# Altium PCB sdram_uni.PcbDoc
Units mm, origin at the board's own origin, x right, y up, seen from the top; angles counter-clockwise.
Board outline 29.21 x 50.8 mm, 2 copper layers (Top Layer, Bottom Layer), stack 1.671 mm thick; 10 components, 41 nets, 138 pads, 16 vias.
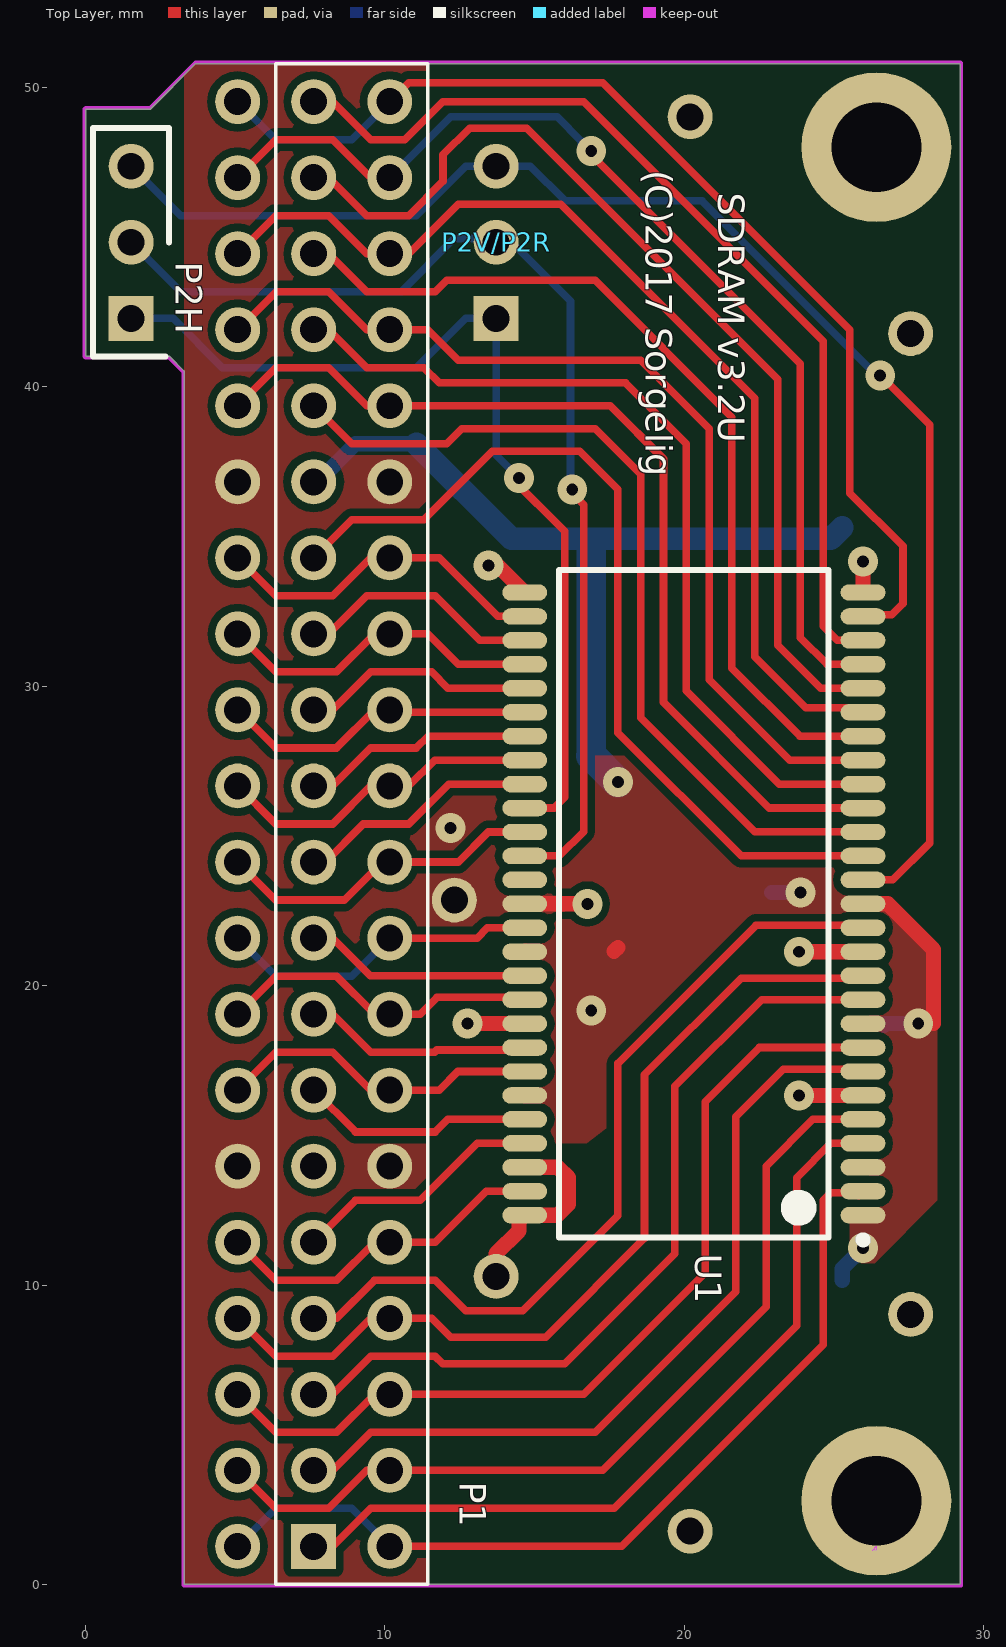
[diagram p0: Top Layer view]
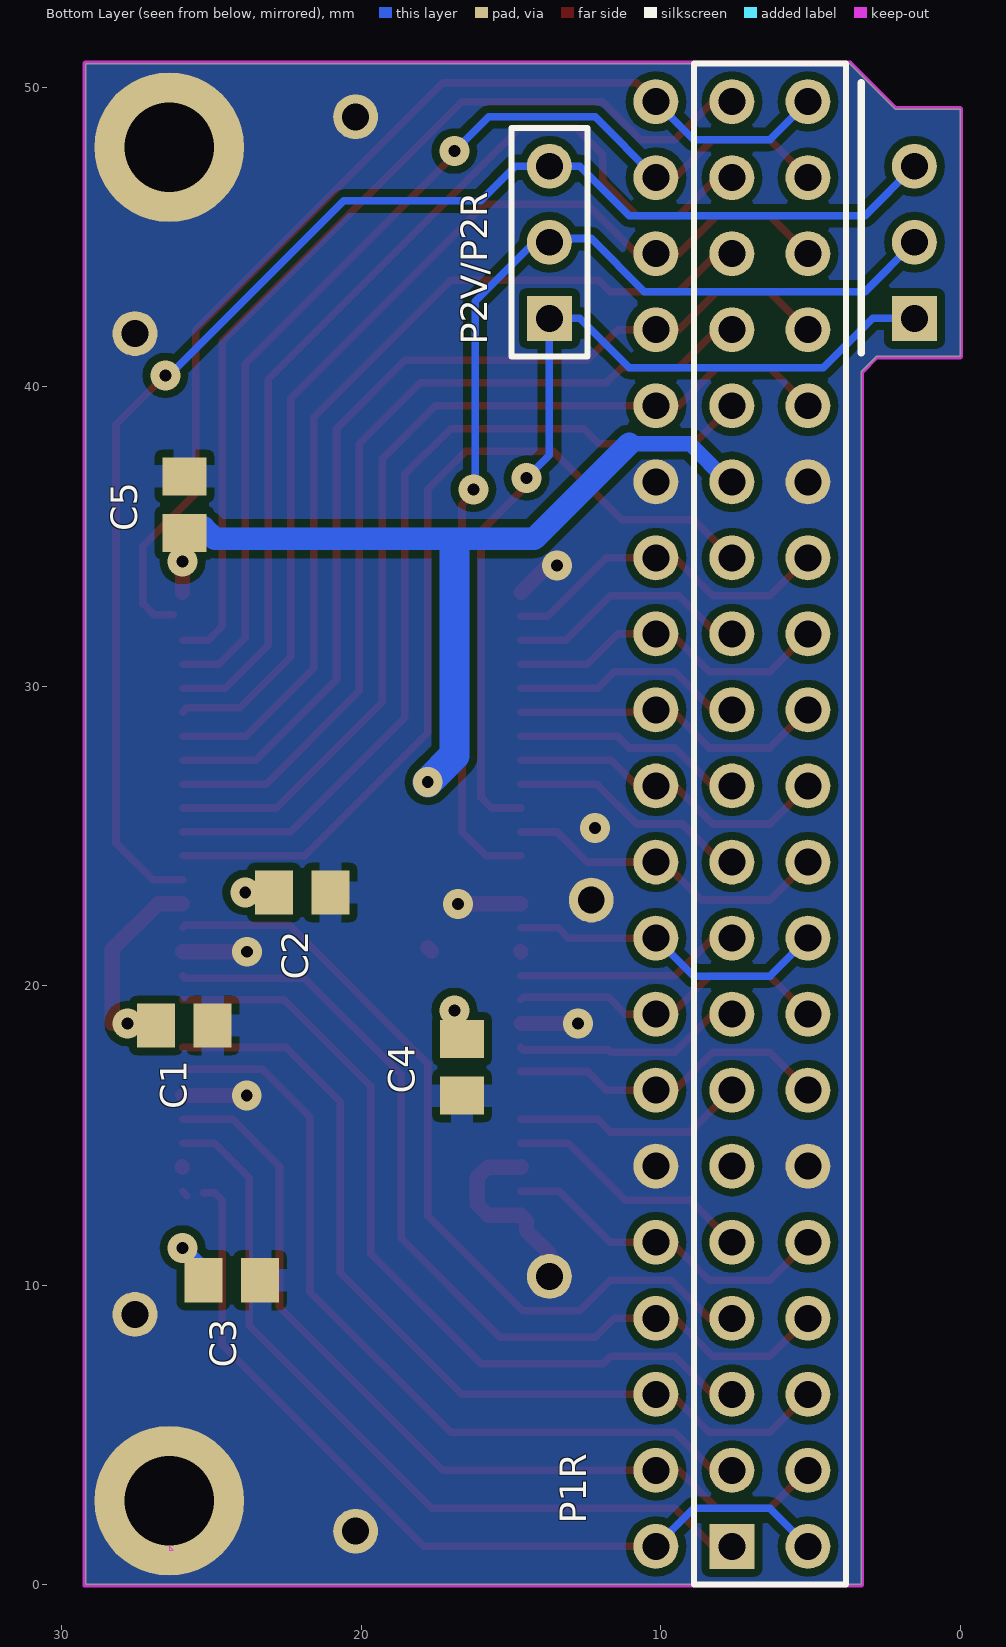
[diagram p1: Bottom Layer view, seen from below]
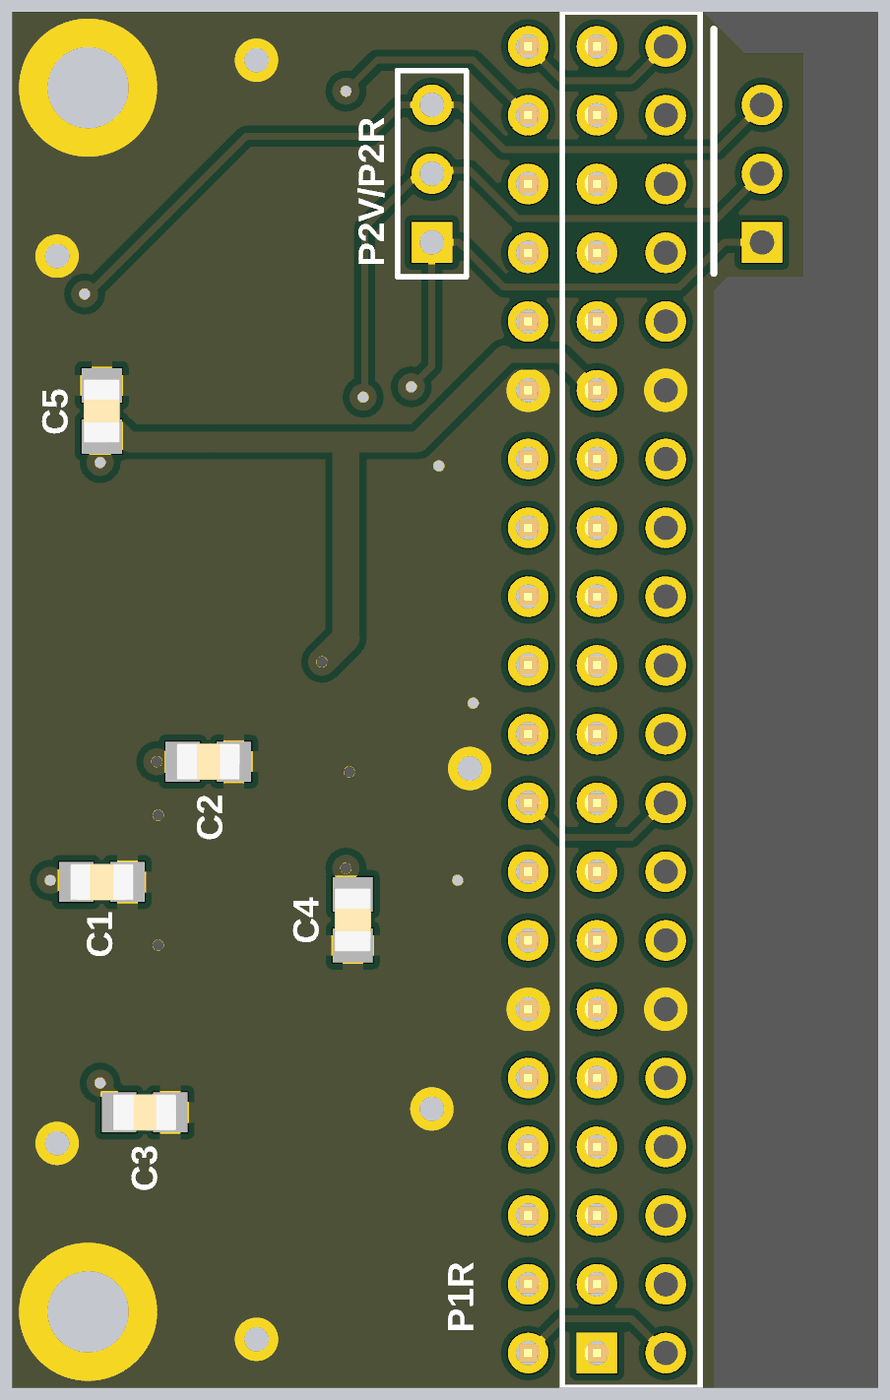
[diagram p2: 3D render of the assembled board from below, using the file's embedded part models]

## Layer stack, top to bottom
Top Solder: solder mask 0.0102, Solder Resist, Dk 3.5
Top Layer: signal copper 0.0356
Dielectric 1: dielectric 1.6, FR-4, Dk 4.8
Bottom Layer: signal copper 0.0356
Bottom Solder: solder mask 0.0102, Solder Resist, Dk 3.5

## Board outline
3.302,40.513 2.794,41.021 0,41.021 0,49.276 2.159,49.276 3.683,50.8 29.21,50.8 29.21,0 3.302,0

## Design rules (kind name [scope] priority, off if disabled: settings)
BoardOutlineClearance [All] p1: gap=0 ignorepadtopadclearanceinfootprint=FALSE
Clearance keep-out_clearance [InNamedPolygon('ground') vs OnLayer('Keep-Out Layer')] p1: gap=0 ignorepadtopadclearanceinfootprint=FALSE
Clearance [All] p2: gap=0.254 ignorepadtopadclearanceinfootprint=TRUE except(0: Arc-Hole Track-Hole SMDPad-Hole THPad-Hole Via-Hole Fill-Hole Poly-Hole Region-Hole Text-Hole)
ComponentClearance [All] p1 off: gap=0.254 collisioncheckmode=3 verticalgap=0.254 showdistances=FALSE
Height [All] p1 off: minheight=0 maxheight=25.4 prefheight=12.7
HoleSize [All] p1: absolutevalues=TRUE maxlimit=6 minlimit=0.025 maxpercent=80.000 minpercent=20.000
MinimumSolderMaskSliver [All] p1: minsoldermaskwidth=0.25
PolygonConnect PolygonConnect_1 [HasFootprint('C0805')] p1: connectstyle=Relief reliefconductorwidth=0.762 reliefentries=4 polygonreliefangle="90 Angle" airgapwidth=0.254
PolygonConnect [All] p2: connectstyle=Direct reliefconductorwidth=0.254 reliefentries=4 polygonreliefangle="90 Angle" airgapwidth=0.254
RoutingVias [All] p1: holewidth=0.4 width=1 viastyle="Through Hole" minholewidth=0.4 minwidth=1 maxholewidth=0.4 maxwidth=1
SilkToSolderMaskClearance [IsPad] p1 off: minsilkscreentomaskgap=0.127 clearancetoexposedcopper=TRUE
SolderMaskExpansion SolderMaskExpansion_U1 [InComponent('U1')] p1: expansion=0
SolderMaskExpansion [All] p2: expansion=0.051
Width Width_power [InNetClass('power')] p1: maxlimit=2 minlimit=0.254 preferedwidth=0.508 minimp=50.000000 maximp=50.000000 favimp=50.000000
Width Width_signal [All] p2: maxlimit=0.254 minlimit=0.254 preferedwidth=0.254
25 further rules are at their usual default settings.

## Classes and differential pairs
net class power: GND VCC

## Components (designator, comment, footprint, x,y, rotation, side; value= is the part's Value field where it differs from the comment)
C1 "C0805" C0805 25.908,18.669 r0 bottom value=0.1uF
C2 "C0805" C0805 21.971,23.114 r0 bottom value=0.1uF
C3 "+" C0805 24.323,10.16 r0 bottom value=0.1uF
C4 "C0805" C0805 16.637,17.272 r90 bottom value=0.1uF
C5 "+" C0805 25.908,36.068 r270 bottom value=0.1uF
P1 "Header 20X2" HDR20x2_90 7.62,1.27 r270 top locked
P1R "Header 20" HDR1X20 5.08,1.27 r90 bottom locked
P2H "Header 3" HDR1X3 1.524,42.291 r90 top locked
P2V/P2R "Header 3" HDR1X3 13.716,42.291 r90 top locked
U1 "" TSOP54 20.32,22.733 r180 top

## Footprints (in the part's own frame and the unit in brackets; to place one, negate y for a bottom-side part, rotate by r counter-clockwise, add the part's x,y. Pads: shape width x height; smd on the part's side, far side on the other; paste and mask are expansions set on the pad)
C0805 [mm] "Capacitor, Chip; 2.35 mm L X 1.35 mm W X 1.00 mm H body"
  rect 1.27x1.48 smd: 1(-0.945,0) 2(0.945,0)
  body extent -1.17,-0.67 1.17,0.67, height 1
HDR1X3 [mm] "Connector; Header; 3 Position"
  rect 1.5x1.5 hole 0.9: 1(0,0)
  round 1.5 hole 0.9: 2(2.54,0) 3(5.08,0)
  silkscreen extent -1.27,-1.27 6.35,1.27
HDR1X20 [mm] "Connector; Header; 20 Position"
  round 1.5 hole 0.9: 1(0,0) 2(2.54,0) 3(5.08,0) 4(7.62,0) 5(10.16,0) 6(12.7,0) 7(15.24,0) 8(17.78,0) 9(20.32,0) 10(22.86,0) 11(25.4,0) 12(27.94,0) 13(30.48,0) 14(33.02,0) 15(35.56,0) 16(38.1,0) 17(40.64,0) 18(43.18,0) 19(45.72,0) 20(48.26,0)
  silkscreen extent -1.27,-1.27 49.53,3.81
HDR20x2_90 [mm] "Header, Right Angle Receptacle, 2.54 mm pitch; 0.65 mm lead width, 40 pins, 2 rows, 20 pins per row, 50.80 mm L X 8.50 mm W X 5.08 mm H body"
  rect 1.5x1.5 hole 0.9: 1(0,0)
  round 1.5 hole 0.9: 2(0,2.54) 3(-2.54,0) 4(-2.54,2.54) 5(-5.08,0) 6(-5.08,2.54) 7(-7.62,0) 8(-7.62,2.54) 9(-10.16,0) 10(-10.16,2.54) 11(-12.7,0) 12(-12.7,2.54) 13(-15.24,0) 14(-15.24,2.54) 15(-17.78,0) 16(-17.78,2.54) 17(-20.32,0) 18(-20.32,2.54) 19(-22.86,0) 20(-22.86,2.54) 21(-25.4,0) 22(-25.4,2.54) 23(-27.94,0) 24(-27.94,2.54) 25(-30.48,0) 26(-30.48,2.54) 27(-33.02,0) 28(-33.02,2.54) 29(-35.56,0) 30(-35.56,2.54) 31(-38.1,0) 32(-38.1,2.54) 33(-40.64,0) 34(-40.64,2.54) 35(-43.18,0) 36(-43.18,2.54) 37(-45.72,0) 38(-45.72,2.54) 39(-48.26,0) 40(-48.26,2.54)
  silkscreen extent -49.53,-1.27 1.27,3.81, body extent -49.53,-10.39 1.27,2.87, height 5.08
TSOP54 [mm] "SOP, 54-Leads, Body 22.3x10.2mm, Pitch 0.8mm, IPC Medium Density"
  oval 1.5x0.55 smd: 1(-5.65,10.4) 2(-5.65,9.6) 3(-5.65,8.8) 4(-5.65,8) 5(-5.65,7.2) 6(-5.65,6.4) 7(-5.65,5.6) 8(-5.65,4.8) 9(-5.65,4) 10(-5.65,3.2) 11(-5.65,2.4) 12(-5.65,1.6) 13(-5.65,0.8) 14(-5.65,0) 15(-5.65,-0.8) 16(-5.65,-1.6) 17(-5.65,-2.4) 18(-5.65,-3.2) 19(-5.65,-4) 20(-5.65,-4.8) 21(-5.65,-5.6) 22(-5.65,-6.4) 23(-5.65,-7.2) 24(-5.65,-8) 25(-5.65,-8.8) 26(-5.65,-9.6) 27(-5.65,-10.4) 28(5.65,-10.4) 29(5.65,-9.6) 30(5.65,-8.8) 31(5.65,-8) 32(5.65,-7.2) 33(5.65,-6.4) 34(5.65,-5.6) 35(5.65,-4.8) 36(5.65,-4) 37(5.65,-3.2) 38(5.65,-2.4) 39(5.65,-1.6) 40(5.65,-0.8) 41(5.65,0) 42(5.65,0.8) 43(5.65,1.6) 44(5.65,2.4) 45(5.65,3.2) 46(5.65,4) 47(5.65,4.8) 48(5.65,5.6) 49(5.65,6.4) 50(5.65,7.2) 51(5.65,8) 52(5.65,8.8) 53(5.65,9.6) 54(5.65,10.4)
  silkscreen extent -5.77,-11.15 4.5,11.35, body extent -5.88,-11.25 5.88,11.27, height 1

## Part data
C1 C2 C4: "Ceramic Chip Capacitor - Standard", PackageDocument=Mar-2001, Code_IPC=2012[0805], Code_JEITA=0805, ComponentLink1Description="Manufacturer Link", ComponentLink1URL=http://www.kemet.com/, ComponentLink2Description=Datasheet, ComponentLink2URL=http://www.kemet.com/kemet/web/homepage/kechome.nsf/vapubfilesname/F3102TA.pdf/$file/F3102TA.pdf, DatasheetDocument=Mar-2001, LatestRevisionDate=19-Mar-2004, LatestRevisionNote="Silkscreen size reduced.", Note="Footprint corresponds to dimensions for bulk cassette packaging. This case size has tightened tolerances.", PackageReference=0805, Published=17-Jul-2002, Publisher="Altium Limited"
C3 C5: library part C0805, "Ceramic Chip Capacitor - Standard", PackageDocument=Mar-2001, Code_IPC=2012[0805], Code_JEITA=0805, ComponentLink1Description="Manufacturer Link", ComponentLink1URL=http://www.kemet.com/, ComponentLink2Description=Datasheet, ComponentLink2URL=http://www.kemet.com/kemet/web/homepage/kechome.nsf/vapubfilesname/F3102TA.pdf/$file/F3102TA.pdf, DatasheetDocument=Mar-2001, LatestRevisionDate=19-Mar-2004, LatestRevisionNote="Silkscreen size reduced.", Note="Footprint corresponds to dimensions for bulk cassette packaging. This case size has tightened tolerances.", PackageReference=0805, Published=17-Jul-2002, Publisher="Altium Limited"
P1: "Header, 20-Pin, Dual row", LatestRevisionDate=17-Jul-2002, LatestRevisionNote="Re-released for DXP Platform.", Publisher="Altium Limited"
P1R: "Header, 20-Pin", LatestRevisionDate=17-Jul-2002, LatestRevisionNote="Re-released for DXP Platform.", Publisher="Altium Limited"
P2H P2V/P2R: "Header, 3-Pin", LatestRevisionDate=17-Jul-2002, LatestRevisionNote="Re-released for DXP Platform.", Publisher="Altium Limited"
U1: library part AS4C16M16SA-6TCN, "256Mb SDR SDRAM, 16Mb x 16, 6ns, 3.3V, 54-Pin TSOP", Manufacturer=Micron, Op. Temp.="0C to +70C", PartNumber=MT48LC16M16A2P-6A, Voltage=3.3V, CL="CL = 3", Clock Rate="167 MHz", ComponentLink1Description="Manufacturer URL", ComponentLink1URL=http://www.micron.com/, ComponentLink2Description=Datasheet, ComponentLink2URL=http://www.micron.com/~/media/Documents/Products/Data%20Sheet/DRAM/256Mb_sdr.pdf, ComponentLink3Description="Package Specification", ComponentLink3URL=http://www.micron.com/~/media/Documents/Products/Data%20Sheet/DRAM/128mb_x4x8x16_sdram.pdf, Cycle Time=6ns, Data Rate=PC133, DatasheetVersion=Rev.Q, Density=256Mb, Depth=16Mb, Mounting Technology="Surface Mount", PackageDescription="54-Pin Thin Small Outline Package, 10.16 x 22.22 mm, Pitch 0.8 mm", PackageReference=MICT-P-54, PackageVersion=Rev.Q, RoHS=Yes, Width=x16

## Free pads (board coordinates)
  round 1.5 hole 0.9: 8(27.559,9.017) ""(12.319,22.86) ""(13.716,10.287) ""(20.193,1.778) ""(20.193,49.022) ""(27.559,41.783)
  round 5 hole 3: ""(26.416,2.794) ""(26.416,48.006)

## Via types
v1: diameter 1, hole 0.4, Top Layer to Bottom Layer, tented both sides, 16 vias

## Nets (pads, with @x,y where several pads share a name; then routed paths per layer and width w, separated by ;. In a path a pad name is that pad's centre, name@x,y a point inside that pad or via, vN(x,y) a via of type N, cw(c..) or ccw(c..) an arc to the next point about the centre after c; other vN are vias at no path point)
A0: P1.37 U1.23 | length 33.6
  Top Layer w0.254: P1.37 8.128,46.99 9.398,45.72 10.795,45.72 11.938,46.863 11.938,47.752 12.827,48.641 14.732,48.641 23.114,40.259 23.114,31.369 24.55,29.933 U1.23
A1: P1.38 P1R.19 U1.24 | length 35.6
  Top Layer w0.254: P1R.19 6.35,48.26 8.255,48.26 9.525,46.99 P1.38 ; v1@16.828,47.816 23.876,40.767 23.876,31.623 24.766,30.733 U1.24
  Bottom Layer w0.254: P1.38 12.192,49.022 15.748,49.022 16.558,48.212 v1@16.558,47.927
  other v1: 16.891,47.879
A2: P1.39 U1.25 | length 32.4
  Top Layer w0.254: P1.39 8.255,49.53 9.525,48.26 10.668,48.26 11.938,49.53 16.637,49.53 24.638,41.529 24.638,32.004 25.109,31.533 U1.25
A3: P1.40 P1R.20 U1.26 | length 36.2
  Top Layer w0.254: P1.40 10.795,50.165 17.272,50.165 25.527,41.91 25.527,36.449 27.305,34.671 27.305,32.766 26.924,32.385 U1.26@26.289,32.385
  Bottom Layer w0.254: P1R.20 6.35,48.26 8.89,48.26 P1.40
A4: P1.28 P1R.14 U1.29 | length 11.5
  Top Layer w0.254: P1R.14 6.35,33.02 8.255,33.02 9.525,34.29 P1.28 11.811,34.29 13.768,32.333 U1.29
A5: P1.25 U1.30 | length 8.2
  Top Layer w0.254: P1.25 8.128,31.75 9.398,33.02 11.684,33.02 13.171,31.533 U1.30
A6: P1.26 P1R.13 U1.31 | length 11.1
  Top Layer w0.254: P1R.13 6.35,30.48 8.382,30.48 9.652,31.75 P1.26 11.43,31.75 12.447,30.733 U1.31
A7: P1.23 U1.32 | length 7.8
  Top Layer w0.254: P1.23 8.255,29.21 9.525,30.48 11.557,30.48 12.104,29.933 U1.32
A8: P1.24 P1R.12 U1.33 | length 10.7
  Top Layer w0.254: P1R.12 6.35,27.94 8.382,27.94 9.652,29.21 P1.24 10.237,29.133 U1.33
A9: P1.21 U1.34 | length 7.7
  Top Layer w0.254: P1.21 8.255,26.67 9.525,27.94 11.049,27.94 11.442,28.333 U1.34
A10: P1.36 P1R.18 U1.22 | length 34.7
  Top Layer w0.254: P1R.18 6.35,45.72 8.128,45.72 9.398,44.45 P1.36 10.795,44.45 12.446,46.101 15.875,46.101 22.352,39.624 22.352,30.988 24.063,29.277 25.826,29.277 U1.22
A11: P1.22 P1R.11 U1.35 | length 11
  Top Layer w0.254: P1R.11 6.35,25.4 8.255,25.4 9.525,26.67 P1.22 10.795,26.67 11.658,27.533 U1.35
A12: P1.19 U1.36 | length 8.1
  Top Layer w0.254: P1.19 8.001,24.13 9.271,25.4 10.795,25.4 12.128,26.733 U1.36
BA0: P1.34 P1R.17 U1.20 | length 32.8
  Top Layer w0.254: P1R.17 5.104,41.91 6.374,43.18 8.128,43.18 9.398,41.91 P1.34 11.43,41.91 12.446,40.894 18.542,40.894 20.828,38.608 20.828,30.226 23.521,27.533 U1.20
BA1: P1.35 U1.21 | length 30.3
  Top Layer w0.254: P1.35 8.128,44.45 9.398,43.18 11.684,43.18 12.065,43.561 17.018,43.561 21.59,38.989 21.59,30.607 23.864,28.333 U1.21
CAS: P1.31 U1.17 | length 29.4
  Top Layer w0.254: P1.31 8.89,38.1 12.065,38.1 12.573,38.608 17.018,38.608 18.542,37.084 18.542,28.956 22.352,25.146 25.957,25.146 U1.17
CKE: P2H.1 P2V/P2R.1 U1.37 | length 31.7
  Top Layer w0.254: v1@14.224,36.957 16.002,35.179 16.002,26.289 15.646,25.933 U1.37
  Bottom Layer w0.254: P2H.1 2.921,42.291 4.572,40.64 11.049,40.64 12.7,42.291 P2V/P2R.1 13.716,37.719 v1@14.224,37.211
  other v1: 14.478,36.957
CLK: P1.20 P1R.10 U1.38 | length 11.1
  Top Layer w0.254: P1R.10 6.35,22.86 8.636,22.86 9.906,24.13 P1.20 12.446,24.13 13.449,25.133 U1.38
CS: P1.33 U1.19 | length 29.5
  Top Layer w0.254: P1.33 8.128,41.91 9.398,40.64 11.303,40.64 11.811,40.132 18.034,40.132 20.066,38.1 20.066,29.845 23.178,26.733 U1.19
DH: P2H.2 P2V/P2R.2 U1.39 | length 37.3
  Top Layer w0.254: U1.39 15.824,24.333 16.637,25.146 16.637,36.068 16.192,36.512 v1@15.938,36.512
  Bottom Layer w0.254: P2H.2 3.175,43.18 10.541,43.18 12.319,44.958 14.097,44.958 16.199,42.856 16.199,36.932 v1@16.002,36.735
  other v1: 16.256,36.576
DL: P2H.3 P2V/P2R.3 U1.15 | length 48.5
  Top Layer w0.254: U1.15 26.962,23.533 28.194,24.765 28.194,38.735 v1(26.543,40.386)
  Bottom Layer w0.254: P2H.3 3.175,45.72 11.049,45.72 12.7,47.371 P2V/P2R.3 14.859,47.371 16.017,46.213 20.589,46.213 26.543,40.259 v1(26.543,40.386)
DQ0: P1.2 P1R.1 U1.2 | length 29.2
  Top Layer w0.254: P1.2 17.907,1.27 24.638,8.001 24.638,12.827 24.892,13.081 U1.2@25.273,13.081 ; U1.2@25.826,12.989 U1.2
  Bottom Layer w0.254: P1R.1 6.35,2.54 8.89,2.54 P1.2
DQ1: P1.1 U1.4 | length 26.8
  Top Layer w0.254: P1.1 8.255,1.27 9.525,2.54 17.653,2.54 23.749,8.636 23.749,13.589 24.893,14.733 U1.4
DQ2: P1.4 P1R.2 U1.5 | length 29.6
  Top Layer w0.254: P1R.2 6.35,2.54 8.128,2.54 9.398,3.81 P1.4 17.272,3.81 22.733,9.271 22.733,13.97 24.296,15.533 U1.5
DQ3: P1.3 U1.7 | length 27.4
  Top Layer w0.254: P1.3 8.255,3.81 9.525,5.08 17.018,5.08 21.717,9.779 21.717,15.621 23.31,17.214 25.889,17.214 U1.7
DQ4: P1.6 P1R.3 U1.8 | length 30.1
  Top Layer w0.254: P1R.3 6.35,5.08 8.382,5.08 9.652,6.35 P1.6 16.637,6.35 20.701,10.414 20.701,16.129 22.505,17.933 U1.8
DQ5: P1.5 U1.10 | length 27.3
  Top Layer w0.254: P1.5 8.255,6.35 9.525,7.62 11.672,7.62 11.926,7.366 16.002,7.366 19.685,11.049 19.685,16.637 22.581,19.533 U1.10
DQ6: P1.8 P1R.4 U1.11 | length 30.4
  Top Layer w0.254: P1R.4 6.35,7.62 8.255,7.62 9.525,8.89 P1.8 11.557,8.89 12.192,8.255 15.367,8.255 18.669,11.557 18.669,17.018 21.903,20.252 25.889,20.252 U1.11
DQ7: P1.7 U1.13 | length 27.6
  Top Layer w0.254: P1.7 8.382,8.89 9.652,10.16 11.684,10.16 12.7,9.144 14.605,9.144 17.78,12.319 17.78,17.399 22.395,22.014 25.889,22.014 U1.13
DQ8: P1.18 P1R.9 U1.42 | length 10.8
  Top Layer w0.254: P1.18 13.081,21.59 13.424,21.933 U1.42
  Bottom Layer w0.254: P1R.9 6.35,20.32 8.89,20.32 P1.18
DQ9: P1.17 U1.44 | length 7.6
  Top Layer w0.254: P1.17 8.255,21.59 9.512,20.333 U1.44
DQ10: P1.16 P1R.8 U1.45 | length 10.9
  Top Layer w0.254: P1R.8 6.35,20.32 8.382,20.32 9.652,19.05 P1.16 11.176,19.05 11.74,19.614 14.589,19.614 U1.45
DQ11: P1.15 U1.47 | length 7.7
  Top Layer w0.254: P1.15 8.255,19.05 9.525,17.78 11.658,17.78 11.73,17.852 14.589,17.852 U1.47 U1.47@14.67,17.919
DQ12: P1.14 P1R.7 U1.48 | length 10.9
  Top Layer w0.254: P1R.7 6.35,17.78 8.255,17.78 9.525,16.51 P1.14 11.811,16.51 12.434,17.133 U1.48
DQ13: P1.13 U1.50 | length 7.8
  Top Layer w0.254: P1.13 9.017,15.113 11.684,15.113 12.104,15.533 U1.50
DQ14: P1.9 U1.51 | length 8.4
  Top Layer w0.254: P1.9 9.017,12.827 11.176,12.827 13.082,14.733 U1.51
DQ15: P1.10 P1R.5 U1.53 | length 11.3
  Top Layer w0.254: P1R.5 6.35,10.16 8.382,10.16 9.652,11.43 P1.10 11.684,11.43 13.387,13.133 U1.53
GND: C1.1 C2.1 C3.1 C4.1 C5.1 P1.12 P1.30 P1R.6 P1R.15 pad. pad.8 U1.6 U1.12 U1.28 U1.41 U1.46 U1.52 U1.54 | length 16.1
  Top Layer w0.508: P1.12@10.16,13.95 P1.12 ; v1@12.89,18.733 U1.46 ; v1(13.462,34.036) 13.767,34.036 U1.28 ; pad.@14.097,10.414 13.716,10.795 13.716,11.049 14.478,11.811 14.478,12.141 U1.54 15.762,12.333 16.129,12.7 16.129,13.589 15.785,13.933 U1.52 U1.52@14.653,13.95 ; U1.41 v1@16.637,22.733 ; v1(23.825,21.133) U1.12 ; v1@23.953,16.333 U1.6
  other v1: 23.826,16.333 12.763,18.733 16.764,22.733 12.192,25.273
RAS: P1.32 P1R.16 U1.18 | length 32.3
  Top Layer w0.254: P1R.16 6.35,40.64 8.128,40.64 9.398,39.37 P1.32 17.526,39.37 19.304,37.592 19.304,29.464 22.835,25.933 U1.18
VCC: C1.2 C2.2 C3.2 C4.2 C5.2 P1.29 U1.1 U1.3 U1.9 U1.14 U1.27 U1.43 U1.49 | length 38.3
  Top Layer w0.508: U1.43 U1.43@14.687,21.15 ; 17.653,21.15 17.78,21.277 ; U1.3 U1.3@25.987,13.95 ; U1.14 26.797,22.733 28.321,21.209 28.321,18.733 ; U1.27 v1(25.97,34.163)
  Bottom Layer w0.508: P1.29 7.747,36.83 9.017,38.1 11.049,38.1 ; C2.2@22.921,23.114 23.749,23.114 v1@23.876,23.241 ; C3.2@25.273,10.16 25.273,10.544 v1(25.97,11.241) ; C1.2@26.665,18.669 26.729,18.733 v1(27.813,18.733) v1@27.94,18.733
  Bottom Layer w0.762: 11.049,38.1 14.224,34.925 24.892,34.925 C5.2@25.273,35.306
  Bottom Layer w1: 16.891,27.686 16.891,34.671
  Bottom Layer w1.016: 16.891,27.686 v1(17.78,26.797)
  other v1: 16.891,19.177 23.876,23.114
WE: P1.27 U1.16 | length 30.2
  Top Layer w0.254: P1.27 8.89,35.56 11.303,35.56 13.589,37.846 16.51,37.846 17.78,36.576 17.78,28.448 21.895,24.333 U1.16
pads on no net: P1.11 U1.40

## Polygon pours and split planes (outlines as drawn)
GND on Top Layer "ground" (solid, remove dead copper, pour order 16): 3.302,40.513 3.302,50.419 3.683,50.8 11.43,50.8 11.43,0 3.302,0
VCC on Top Layer "power" (solid, remove dead copper, pour order 14): 25.908,10.731 25.908,10.922 25.527,11.303 25.527,12.333 26.162,12.333 26.162,22.225 26.86,22.924 28.448,21.336 28.448,12.827 26.352,10.731
GND on Top Layer "ground" (solid, remove dead copper, pour order 12): 7.62,22.225 8.5,21.345 16.002,21.336 16.002,26.67 7.62,26.67
VCC on Top Layer "power" (solid, remove dead copper, pour order 10): 14.66,14.756 14.67,14.746 14.67,14.733 16.746,14.733 22.607,19.304 25.934,19.304 25.934,27.686 14.605,27.686 14.605,14.733
GND on Bottom Layer "ground" (solid, remove dead copper, pour order 8): 3.299,40.516 2.793,41.017 -0.003,41.017 -0.003,49.264 2.158,49.269 3.687,50.804 29.207,50.786 29.207,-0.004 3.299,-0.004

## Keep-outs
Keep-Out Layer:
  pour cut-out: 26.289,1.143 26.416,1.27 26.416,1.143
  lines w0.1: 29.21,-0.05 ccw(c29.21,0) 29.26,0 ; -0.05,41.021 ccw(c0,41.021) 0,40.971 ; -0.05,41.021 ccw(c0,41.021) 0,40.971 ; -0.05,41.021 -0.05,49.276 ; -0.05,49.276 cw(c0,49.276) 0,49.326 ; -0.05,49.276 cw(c0,49.276) 0,49.326 ; 0,40.971 2.773,40.971 3.252,40.492 3.252,0 ; 0,49.326 2.138,49.326 3.647,50.835 ; 3.252,0 ccw(c3.302,0) 3.302,-0.05 ; 3.252,0 ccw(c3.302,0) 3.302,-0.05 ; 3.302,-0.05 29.26,-0.05 29.26,50.8 ; 3.648,50.835 cw(c3.683,50.8) 3.683,50.85 ; 3.647,50.835 cw(c3.683,50.8) 3.683,50.85 ; 3.647,50.835 3.648,50.835 ; 3.683,50.85 29.21,50.85 ; 29.21,50.85 cw(c29.21,50.8) 29.26,50.8 ; 29.21,50.85 cw(c29.21,50.8) 29.26,50.8

## Silkscreen, mask and mechanical layers (free items; w line width, h text height)
Top Overlay:
  lines w0.2: 2.794,44.831 2.794,48.641
  text "(C)2017 Sorgelig" at 18.415,47.244 h1.52 r270
  text "SDRAM v3.2U" at 20.828,46.482 h1.52 r270
Bottom Overlay:
  lines w0.254: 3.302,41.148 3.302,50.165